# EAGLE board PDD_pan (EAGLE 6.2), part 1 of 2
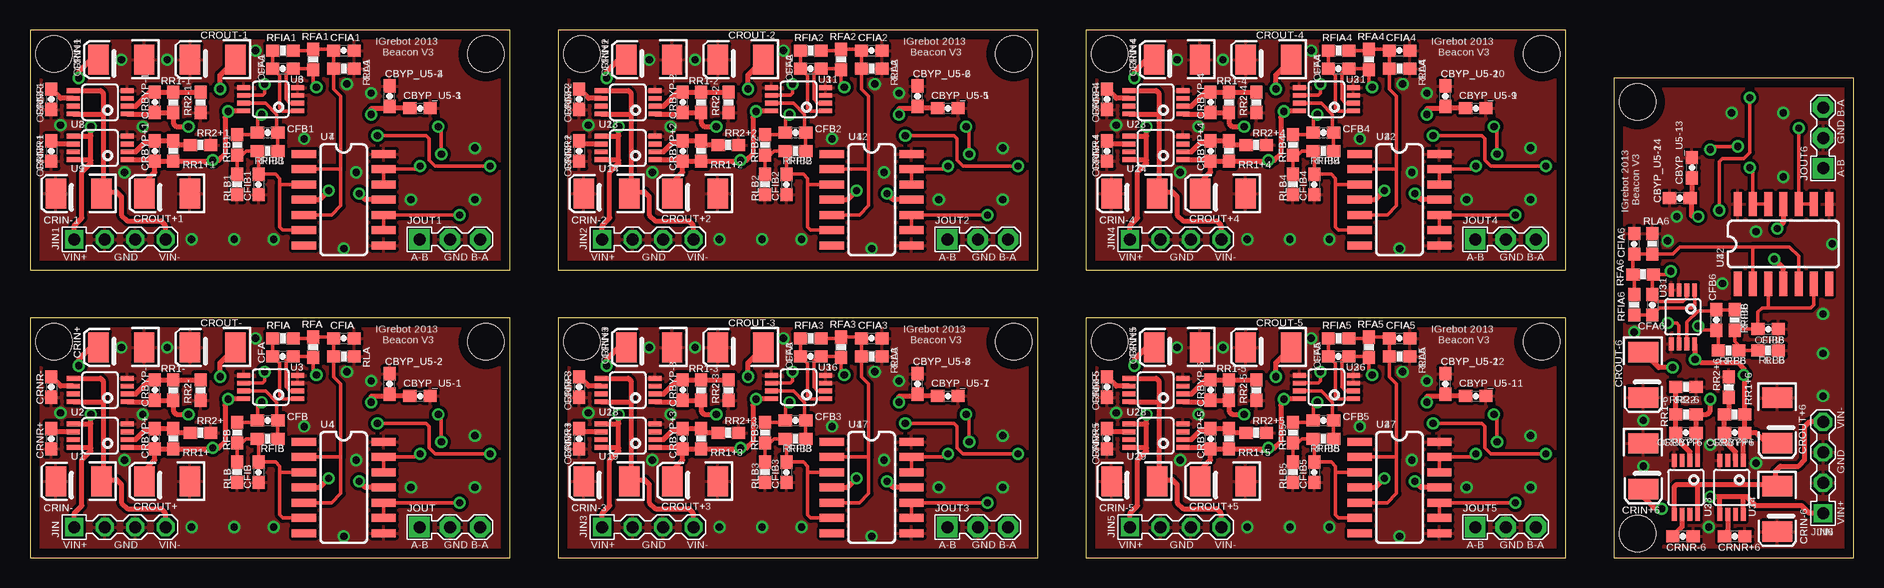
[diagram p0: board, top side]
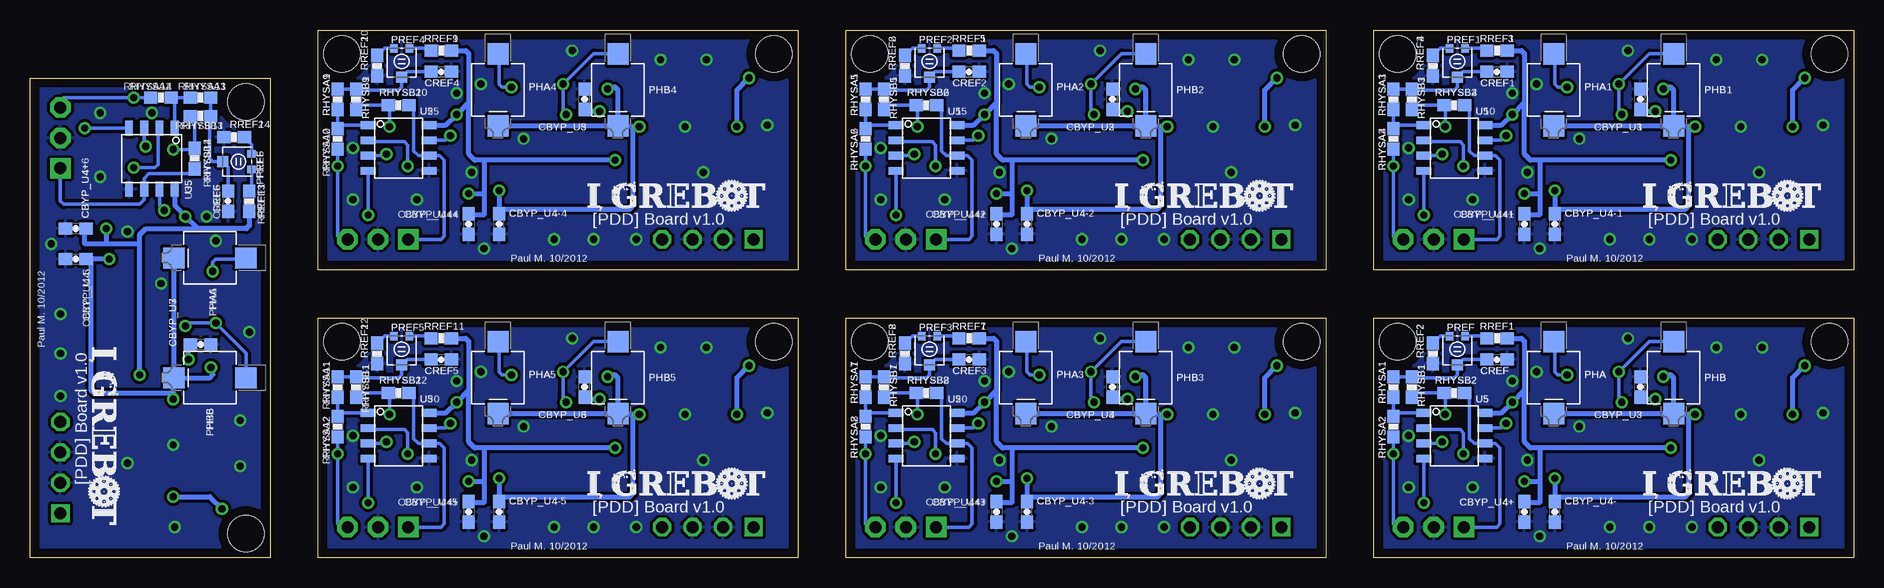
[diagram p1: board, bottom side, seen from below]

Size 152 x 44 mm. Coordinates in mm from the lower left corner, seen from the top.
Outline: 0,0 40,0 40,20 0,20 0,0
Outline: 0,24 40,24 40,44 0,44 0,24
Outline: 44,24 84,24 84,44 44,44 44,24
Outline: 44,0 84,0 84,20 44,20 44,0
Outline: 88,24 128,24 128,44 88,44 88,24
Outline: 88,0 128,0 128,20 88,20 88,0
Outline: 152,0 152,40 132,40 132,0 152,0
Copper layers (1*16): Top 0.035mm / dielectric 1.5mm / Bottom 0.035mm
Design rules: minimum track width 10mil, minimum drill 0.6mm, track to track 8mil, track to pad 8mil, pad to pad 8mil, via to via 8mil, smd to smd 8mil, copper to edge 30mil, drill to drill 10mil, minimum pad ring 10mil, minimum via ring 8mil, stop-mask expansion 4mil, vias tented up to drill 0mil, thermal gap 10mil
Holes 3 mm at 38,18 2,18 38,42 2,42 82,42 46,42 82,18 46,18 126,42 90,42 126,18 90,18 134,38 134,2

## Footprints (pad centres in the part's own frame; a part is rotated, then mirrored left to right if it is on the bottom)
0603-CAP = smd 1.1 x 1: 1 -0.85,0; 2 0.85,0
EIA3528-KIT = smd 1.7 x 2.5: A 1.9,0; C -1.9,0
CON4-2.54 = drill 1 square: 1 -3.81,0 | drill 1 octagon: 2 -1.27,0; 3 1.27,0; 4 3.81,0
CON3-2.54 = drill 1 pad 1.676 square: 1 -2.54,0 | drill 1 pad 1.676 octagon: 2 0,0; 3 2.54,0
VBPW34SR = smd 1.8 x 1.75: A -3,0; K 3,0
TRIM-PVZ2A = smd 0.6 x 0.7: 1 -0.65,-1.2; 3 0.65,-1.2 | smd 0.9 x 0.9: 2 0,1.2
0603-RES = smd 1.1 x 1: 1 -0.85,0; 2 0.85,0
MSOP8 = smd 0.4 x 1.1: 1 -0.975,-2.25; 2 -0.325,-2.25; 3 0.325,-2.25; 4 0.975,-2.25; 5 0.975,2.25; 6 0.325,2.25; 7 -0.325,2.25; 8 -0.975,2.25
SOIC14 = smd 0.66 x 2.032: 1 -3.81,-3.315; 2 -2.54,-3.315; 3 -1.27,-3.315; 4 0,-3.315; 5 1.27,-3.315; 6 2.54,-3.315; 7 3.81,-3.315; 8 3.81,3.315; 9 2.54,3.315; 10 1.27,3.315; 11 0,3.315; 12 -1.27,3.315; 13 -2.54,3.315; 14 -3.81,3.315
SOIC8 = smd 0.635 x 1.27: 1 -1.905,-2.54; 2 -0.635,-2.54; 3 0.635,-2.54; 4 1.905,-2.54; 5 1.905,2.54; 6 0.635,2.54; 7 -0.635,2.54; 8 -1.905,2.54

## Placement (x,y rotation side)
CBYP_U1  1uF  [0603-CAP]  17.78,38.22 90 bottom
CBYP_U2  1uF  [0603-CAP]  61.78,38.22 90 bottom
CBYP_U3  1uF  [0603-CAP]  17.78,14.22 90 bottom
CBYP_U4  1uF  [0603-CAP]  61.78,14.22 90 bottom
CBYP_U4+  1uF  [0603-CAP]  27.43,3.81 270 bottom
CBYP_U4+1  1uF  [0603-CAP]  27.43,27.81 270 bottom
CBYP_U4+2  1uF  [0603-CAP]  71.43,27.81 270 bottom
CBYP_U4+3  1uF  [0603-CAP]  71.43,3.81 270 bottom
CBYP_U4+4  1uF  [0603-CAP]  115.43,27.81 270 bottom
CBYP_U4+5  1uF  [0603-CAP]  115.43,3.81 270 bottom
CBYP_U4+6  1uF  [0603-CAP]  148.19,27.43 180 bottom
CBYP_U4-  1uF  [0603-CAP]  24.89,3.81 90 bottom
CBYP_U4-1  1uF  [0603-CAP]  24.89,27.81 90 bottom
CBYP_U4-2  1uF  [0603-CAP]  68.89,27.81 90 bottom
CBYP_U4-3  1uF  [0603-CAP]  68.89,3.81 90 bottom
CBYP_U4-4  1uF  [0603-CAP]  112.89,27.81 90 bottom
CBYP_U4-5  1uF  [0603-CAP]  112.89,3.81 90 bottom
CBYP_U4-6  1uF  [0603-CAP]  148.19,24.89 0 bottom
CBYP_U5  1uF  [0603-CAP]  105.78,38.22 90 bottom
CBYP_U5-1  1uF  [0603-CAP]  32.51,13.46 0 top
CBYP_U5-2  100nF  [0603-CAP]  29.97,14.48 90 top
CBYP_U5-3  1uF  [0603-CAP]  32.51,37.46 0 top
CBYP_U5-4  100nF  [0603-CAP]  29.97,38.48 90 top
CBYP_U5-5  1uF  [0603-CAP]  76.51,37.46 0 top
CBYP_U5-6  100nF  [0603-CAP]  73.97,38.48 90 top
CBYP_U5-7  1uF  [0603-CAP]  76.51,13.46 0 top
CBYP_U5-8  100nF  [0603-CAP]  73.97,14.48 90 top
CBYP_U5-9  1uF  [0603-CAP]  120.51,37.46 0 top
CBYP_U5-10  100nF  [0603-CAP]  117.97,38.48 90 top
CBYP_U5-11  1uF  [0603-CAP]  120.51,13.46 0 top
CBYP_U5-12  100nF  [0603-CAP]  117.97,14.48 90 top
CBYP_U5-13  1uF  [0603-CAP]  138.54,32.51 90 top
CBYP_U5-14  100nF  [0603-CAP]  137.52,29.97 180 top
CBYP_U6  1uF  [0603-CAP]  105.78,14.22 90 bottom
CBYP_U7  1uF  [0603-CAP]  137.78,17.78 0 bottom
CFA  33pF  [0603-CAP]  21.08,16.76 180 top
CFA1  33pF  [0603-CAP]  21.08,40.76 180 top
CFA2  33pF  [0603-CAP]  65.08,40.76 180 top
CFA3  33pF  [0603-CAP]  65.08,16.76 180 top
CFA4  33pF  [0603-CAP]  109.08,40.76 180 top
CFA5  33pF  [0603-CAP]  109.08,16.76 180 top
CFA6  33pF  [0603-CAP]  135.24,21.08 270 top
CFB  33pF  [0603-CAP]  19.81,11.43 0 top
CFB1  33pF  [0603-CAP]  19.81,35.43 0 top
CFB2  33pF  [0603-CAP]  63.81,35.43 0 top
CFB3  33pF  [0603-CAP]  63.81,11.43 0 top
CFB4  33pF  [0603-CAP]  107.81,35.43 0 top
CFB5  33pF  [0603-CAP]  107.81,11.43 0 top
CFB6  33pF  [0603-CAP]  140.57,19.81 90 top
CFIA  100nF  [0603-CAP]  26.16,18.29 0 top
CFIA1  100nF  [0603-CAP]  26.16,42.29 0 top
CFIA2  100nF  [0603-CAP]  70.16,42.29 0 top
CFIA3  100nF  [0603-CAP]  70.16,18.29 0 top
CFIA4  100nF  [0603-CAP]  114.16,42.29 0 top
CFIA5  100nF  [0603-CAP]  114.16,18.29 0 top
CFIA6  100nF  [0603-CAP]  133.71,26.16 90 top
CFIB  100nF  [0603-CAP]  19.05,7.11 270 top
CFIB1  100nF  [0603-CAP]  19.05,31.11 270 top
CFIB2  100nF  [0603-CAP]  63.05,31.11 270 top
CFIB3  100nF  [0603-CAP]  63.05,7.11 270 top
CFIB4  100nF  [0603-CAP]  107.05,31.11 270 top
CFIB5  100nF  [0603-CAP]  107.05,7.11 270 top
CFIB6  100nF  [0603-CAP]  144.89,19.05 0 top
CRBYP+  10nF  [0603-CAP]  10.41,9.91 90 top
CRBYP+1  10nF  [0603-CAP]  10.41,33.91 90 top
CRBYP+2  10nF  [0603-CAP]  54.41,33.91 90 top
CRBYP+3  10nF  [0603-CAP]  54.41,9.91 90 top
CRBYP+4  10nF  [0603-CAP]  98.41,33.91 90 top
CRBYP+5  10nF  [0603-CAP]  98.41,9.91 90 top
CRBYP+6  10nF  [0603-CAP]  142.09,10.41 180 top
CRBYP-  10nF  [0603-CAP]  10.41,13.97 90 top
CRBYP-1  10nF  [0603-CAP]  10.41,37.97 90 top
CRBYP-2  10nF  [0603-CAP]  54.41,37.97 90 top
CRBYP-3  10nF  [0603-CAP]  54.41,13.97 90 top
CRBYP-4  10nF  [0603-CAP]  98.41,37.97 90 top
CRBYP-5  10nF  [0603-CAP]  98.41,13.97 90 top
CRBYP-6  10nF  [0603-CAP]  138.03,10.41 180 top
CREF  470nF  [0603-CAP]  29.72,16.51 0 bottom
CREF1  470nF  [0603-CAP]  29.72,40.51 0 bottom
CREF2  470nF  [0603-CAP]  73.72,40.51 0 bottom
CREF3  470nF  [0603-CAP]  73.72,16.51 0 bottom
CREF4  470nF  [0603-CAP]  117.72,40.51 0 bottom
CREF5  470nF  [0603-CAP]  117.72,16.51 0 bottom
CREF6  470nF  [0603-CAP]  135.49,29.72 270 bottom
CRIN+  10uF  [EIA3528-KIT]  7.62,17.53 180 top
CRIN+1  10uF  [EIA3528-KIT]  7.62,41.53 180 top
CRIN+2  10uF  [EIA3528-KIT]  51.62,41.53 180 top
CRIN+3  10uF  [EIA3528-KIT]  51.62,17.53 180 top
CRIN+4  10uF  [EIA3528-KIT]  95.62,41.53 180 top
CRIN+5  10uF  [EIA3528-KIT]  95.62,17.53 180 top
CRIN+6  10uF  [EIA3528-KIT]  134.47,7.62 270 top
CRIN-  10uF  [EIA3528-KIT]  4.06,6.35 180 top
CRIN-1  10uF  [EIA3528-KIT]  4.06,30.35 180 top
CRIN-2  10uF  [EIA3528-KIT]  48.06,30.35 180 top
CRIN-3  10uF  [EIA3528-KIT]  48.06,6.35 180 top
CRIN-4  10uF  [EIA3528-KIT]  92.06,30.35 180 top
CRIN-5  10uF  [EIA3528-KIT]  92.06,6.35 180 top
CRIN-6  10uF  [EIA3528-KIT]  145.65,4.06 270 top
CRNR+  10nF  [0603-CAP]  1.78,9.91 270 top
CRNR+1  10nF  [0603-CAP]  1.78,33.91 270 top
CRNR+2  10nF  [0603-CAP]  45.78,33.91 270 top
CRNR+3  10nF  [0603-CAP]  45.78,9.91 270 top
CRNR+4  10nF  [0603-CAP]  89.78,33.91 270 top
CRNR+5  10nF  [0603-CAP]  89.78,9.91 270 top
CRNR+6  10nF  [0603-CAP]  142.09,1.78 0 top
CRNR-  10nF  [0603-CAP]  1.78,14.22 270 top
CRNR-1  10nF  [0603-CAP]  1.78,38.22 270 top
CRNR-2  10nF  [0603-CAP]  45.78,38.22 270 top
CRNR-3  10nF  [0603-CAP]  45.78,14.22 270 top
CRNR-4  10nF  [0603-CAP]  89.78,38.22 270 top
CRNR-5  10nF  [0603-CAP]  89.78,14.22 270 top
CRNR-6  10nF  [0603-CAP]  137.78,1.78 0 top
CROUT+  10uF  [EIA3528-KIT]  11.43,6.35 180 top
CROUT+1  10uF  [EIA3528-KIT]  11.43,30.35 180 top
CROUT+2  10uF  [EIA3528-KIT]  55.43,30.35 180 top
CROUT+3  10uF  [EIA3528-KIT]  55.43,6.35 180 top
CROUT+4  10uF  [EIA3528-KIT]  99.43,30.35 180 top
CROUT+5  10uF  [EIA3528-KIT]  99.43,6.35 180 top
CROUT+6  10uF  [EIA3528-KIT]  145.65,11.43 270 top
CROUT-  10uF  [EIA3528-KIT]  15.24,17.53 180 top
CROUT-1  10uF  [EIA3528-KIT]  15.24,41.53 180 top
CROUT-2  10uF  [EIA3528-KIT]  59.24,41.53 180 top
CROUT-3  10uF  [EIA3528-KIT]  59.24,17.53 180 top
CROUT-4  10uF  [EIA3528-KIT]  103.24,41.53 180 top
CROUT-5  10uF  [EIA3528-KIT]  103.24,17.53 180 top
CROUT-6  10uF  [EIA3528-KIT]  134.47,15.24 270 top
JIN  SIL4  [CON4-2.54]  7.5,2.54 0 top
JIN1  SIL4  [CON4-2.54]  7.5,26.54 0 top
JIN2  SIL4  [CON4-2.54]  51.5,26.54 0 top
JIN3  SIL4  [CON4-2.54]  51.5,2.54 0 top
JIN4  SIL4  [CON4-2.54]  95.5,26.54 0 top
JIN5  SIL4  [CON4-2.54]  95.5,2.54 0 top
JIN6  SIL4  [CON4-2.54]  149.46,7.5 90 top
JOUT  SIL3  [CON3-2.54]  35,2.54 0 top
JOUT1  SIL3  [CON3-2.54]  35,26.54 0 top
JOUT2  SIL3  [CON3-2.54]  79,26.54 0 top
JOUT3  SIL3  [CON3-2.54]  79,2.54 0 top
JOUT4  SIL3  [CON3-2.54]  123,26.54 0 top
JOUT5  SIL3  [CON3-2.54]  123,2.54 0 top
JOUT6  SIL3  [CON3-2.54]  149.46,35 90 top
PHA  VBPW34SR  [VBPW34SR]  25,15 90 bottom
PHA1  VBPW34SR  [VBPW34SR]  25,39 90 bottom
PHA2  VBPW34SR  [VBPW34SR]  69,39 90 bottom
PHA3  VBPW34SR  [VBPW34SR]  69,15 90 bottom
PHA4  VBPW34SR  [VBPW34SR]  113,39 90 bottom
PHA5  VBPW34SR  [VBPW34SR]  113,15 90 bottom
PHA6  VBPW34SR  [VBPW34SR]  137,25 0 bottom
PHB  VBPW34SR  [VBPW34SR]  15,15 90 bottom
PHB1  VBPW34SR  [VBPW34SR]  15,39 90 bottom
PHB2  VBPW34SR  [VBPW34SR]  59,39 90 bottom
PHB3  VBPW34SR  [VBPW34SR]  59,15 90 bottom
PHB4  VBPW34SR  [VBPW34SR]  103,39 90 bottom
PHB5  VBPW34SR  [VBPW34SR]  103,15 90 bottom
PHB6  VBPW34SR  [VBPW34SR]  137,15 0 bottom
PREF  100k  [TRIM-PVZ2A]  33.02,17.27 180 bottom
PREF1  100k  [TRIM-PVZ2A]  33.02,41.27 180 bottom
PREF2  100k  [TRIM-PVZ2A]  77.02,41.27 180 bottom
PREF3  100k  [TRIM-PVZ2A]  77.02,17.27 180 bottom
PREF4  100k  [TRIM-PVZ2A]  121.02,41.27 180 bottom
PREF5  100k  [TRIM-PVZ2A]  121.02,17.27 180 bottom
PREF6  100k  [TRIM-PVZ2A]  134.73,33.02 90 bottom
RFA  20k  [0603-RES]  23.62,17.53 90 top
RFA1  20k  [0603-RES]  23.62,41.53 90 top
RFA2  20k  [0603-RES]  67.62,41.53 90 top
RFA3  20k  [0603-RES]  67.62,17.53 90 top
RFA4  20k  [0603-RES]  111.62,41.53 90 top
RFA5  20k  [0603-RES]  111.62,17.53 90 top
RFA6  20k  [0603-RES]  134.47,23.62 180 top
RFB  20k  [0603-RES]  17.27,10.41 270 top
RFB1  20k  [0603-RES]  17.27,34.41 270 top
RFB2  20k  [0603-RES]  61.27,34.41 270 top
RFB3  20k  [0603-RES]  61.27,10.41 270 top
RFB4  20k  [0603-RES]  105.27,34.41 270 top
RFB5  20k  [0603-RES]  105.27,10.41 270 top
RFB6  20k  [0603-RES]  141.59,17.27 0 top
RFIA  100  [0603-RES]  21.08,18.29 0 top
RFIA1  100  [0603-RES]  21.08,42.29 0 top
RFIA2  100  [0603-RES]  65.08,42.29 0 top
RFIA3  100  [0603-RES]  65.08,18.29 0 top
RFIA4  100  [0603-RES]  109.08,42.29 0 top
RFIA5  100  [0603-RES]  109.08,18.29 0 top
RFIA6  100  [0603-RES]  133.71,21.08 90 top
RFIB  100  [0603-RES]  19.81,9.91 180 top
RFIB1  100  [0603-RES]  19.81,33.91 180 top
RFIB2  100  [0603-RES]  63.81,33.91 180 top
RFIB3  100  [0603-RES]  63.81,9.91 180 top
RFIB4  100  [0603-RES]  107.81,33.91 180 top
RFIB5  100  [0603-RES]  107.81,9.91 180 top
RFIB6  100  [0603-RES]  142.09,19.81 270 top
RHYSA1  100  [0603-RES]  38.35,14.22 270 bottom
RHYSA2  10k  [0603-RES]  38.35,10.92 270 bottom
RHYSA3  100  [0603-RES]  38.35,38.22 270 bottom
RHYSA4  10k  [0603-RES]  38.35,34.92 270 bottom
RHYSA5  100  [0603-RES]  82.35,38.22 270 bottom
RHYSA6  10k  [0603-RES]  82.35,34.92 270 bottom
RHYSA7  100  [0603-RES]  82.35,14.22 270 bottom
RHYSA8  10k  [0603-RES]  82.35,10.92 270 bottom
RHYSA9  100  [0603-RES]  126.35,38.22 270 bottom
RHYSA10  10k  [0603-RES]  126.35,34.92 270 bottom
RHYSA11  100  [0603-RES]  126.35,14.22 270 bottom
RHYSA12  10k  [0603-RES]  126.35,10.92 270 bottom
RHYSA13  100  [0603-RES]  137.78,38.35 180 bottom
RHYSA14  10k  [0603-RES]  141.08,38.35 180 bottom
RHYSB1  100  [0603-RES]  36.83,14.22 270 bottom
RHYSB2  10k  [0603-RES]  33.27,13.72 0 bottom
RHYSB3  100  [0603-RES]  36.83,38.22 270 bottom
RHYSB4  10k  [0603-RES]  33.27,37.72 0 bottom
RHYSB5  100  [0603-RES]  80.83,38.22 270 bottom
RHYSB6  10k  [0603-RES]  77.27,37.72 0 bottom
RHYSB7  100  [0603-RES]  80.83,14.22 270 bottom
RHYSB8  10k  [0603-RES]  77.27,13.72 0 bottom
RHYSB9  100  [0603-RES]  124.83,38.22 270 bottom
RHYSB10  10k  [0603-RES]  121.27,37.72 0 bottom
RHYSB11  100  [0603-RES]  124.83,14.22 270 bottom
RHYSB12  10k  [0603-RES]  121.27,13.72 0 bottom
RHYSB13  100  [0603-RES]  137.78,36.83 180 bottom
RHYSB14  10k  [0603-RES]  138.28,33.27 270 bottom
RLA  100k  [0603-RES]  26.16,16.76 180 top
RLA1  100k  [0603-RES]  26.16,40.76 180 top
RLA2  100k  [0603-RES]  70.16,40.76 180 top
RLA3  100k  [0603-RES]  70.16,16.76 180 top
RLA4  100k  [0603-RES]  114.16,40.76 180 top
RLA5  100k  [0603-RES]  114.16,16.76 180 top
RLA6  100k  [0603-RES]  135.24,26.16 270 top
RLB  100k  [0603-RES]  17.27,7.11 90 top
RLB1  100k  [0603-RES]  17.27,31.11 90 top
RLB2  100k  [0603-RES]  61.27,31.11 90 top
RLB3  100k  [0603-RES]  61.27,7.11 90 top
RLB4  100k  [0603-RES]  105.27,31.11 90 top
RLB5  100k  [0603-RES]  105.27,7.11 90 top
RLB6  100k  [0603-RES]  144.89,17.27 180 top
RR1+  31.6k  [0603-RES]  11.94,9.91 270 top
RR1+1  31.6k  [0603-RES]  11.94,33.91 270 top
RR1+2  31.6k  [0603-RES]  55.94,33.91 270 top
RR1+3  31.6k  [0603-RES]  55.94,9.91 270 top
RR1+4  31.6k  [0603-RES]  99.94,33.91 270 top
RR1+5  31.6k  [0603-RES]  99.94,9.91 270 top
RR1+6  31.6k  [0603-RES]  142.09,11.94 0 top
RR1-  31.6k  [0603-RES]  11.94,13.97 270 top
RR1-1  31.6k  [0603-RES]  11.94,37.97 270 top
RR1-2  31.6k  [0603-RES]  55.94,37.97 270 top
RR1-3  31.6k  [0603-RES]  55.94,13.97 270 top
RR1-4  31.6k  [0603-RES]  99.94,37.97 270 top
RR1-5  31.6k  [0603-RES]  99.94,13.97 270 top
RR1-6  31.6k  [0603-RES]  138.03,11.94 0 top
RR2+  10k  [0603-RES]  14.22,10.41 180 top
RR2+1  10k  [0603-RES]  14.22,34.41 180 top
RR2+2  10k  [0603-RES]  58.22,34.41 180 top
RR2+3  10k  [0603-RES]  58.22,10.41 180 top
RR2+4  10k  [0603-RES]  102.22,34.41 180 top
RR2+5  10k  [0603-RES]  102.22,10.41 180 top
RR2+6  10k  [0603-RES]  141.59,14.22 270 top
RR2-  10k  [0603-RES]  14.22,13.97 90 top
RR2-1  10k  [0603-RES]  14.22,37.97 90 top
RR2-2  10k  [0603-RES]  58.22,37.97 90 top
RR2-3  10k  [0603-RES]  58.22,13.97 90 top
RR2-4  10k  [0603-RES]  102.22,37.97 90 top
RR2-5  10k  [0603-RES]  102.22,13.97 90 top
RR2-6  10k  [0603-RES]  138.03,14.22 180 top
RREF1  100  [0603-RES]  29.72,18.29 180 bottom
RREF2  100  [0603-RES]  35.05,17.02 90 bottom
RREF3  100  [0603-RES]  29.72,42.29 180 bottom
RREF4  100  [0603-RES]  35.05,41.02 90 bottom
RREF5  100  [0603-RES]  73.72,42.29 180 bottom
RREF6  100  [0603-RES]  79.05,41.02 90 bottom
RREF7  100  [0603-RES]  73.72,18.29 180 bottom
RREF8  100  [0603-RES]  79.05,17.02 90 bottom
RREF9  100  [0603-RES]  117.72,42.29 180 bottom
RREF10  100  [0603-RES]  123.05,41.02 90 bottom
RREF11  100  [0603-RES]  117.72,18.29 180 bottom
RREF12  100  [0603-RES]  123.05,17.02 90 bottom
RREF13  100  [0603-RES]  133.71,29.72 90 bottom
RREF14  100  [0603-RES]  134.98,35.05 0 bottom
U1  TPS7A4901NO_PAD  [MSOP8]  5.84,10.16 90 top
U2  TPS7A3001NO_PAD  [MSOP8]  5.84,13.97 90 top
U3  OPA2380  [MSOP8]  20.07,14.22 90 top
U4  INA2143  [SOIC14]  26.16,5.84 270 top
U5  TLV3502  [SOIC8]  33.27,10.16 270 bottom
U6  OPA2380  [MSOP8]  20.07,38.22 90 top
U7  INA2143  [SOIC14]  26.16,29.84 270 top
U8  TPS7A3001NO_PAD  [MSOP8]  5.84,37.97 90 top
U9  TPS7A4901NO_PAD  [MSOP8]  5.84,34.16 90 top
U10  TLV3502  [SOIC8]  33.27,34.16 270 bottom
U11  OPA2380  [MSOP8]  64.07,38.22 90 top
U12  INA2143  [SOIC14]  70.16,29.84 270 top
U13  TPS7A3001NO_PAD  [MSOP8]  49.84,37.97 90 top
U14  TPS7A4901NO_PAD  [MSOP8]  49.84,34.16 90 top
U15  TLV3502  [SOIC8]  77.27,34.16 270 bottom
U16  OPA2380  [MSOP8]  64.07,14.22 90 top
U17  INA2143  [SOIC14]  70.16,5.84 270 top
U18  TPS7A3001NO_PAD  [MSOP8]  49.84,13.97 90 top
U19  TPS7A4901NO_PAD  [MSOP8]  49.84,10.16 90 top
U20  TLV3502  [SOIC8]  77.27,10.16 270 bottom
U21  OPA2380  [MSOP8]  108.07,38.22 90 top
U22  INA2143  [SOIC14]  114.16,29.84 270 top
U23  TPS7A3001NO_PAD  [MSOP8]  93.84,37.97 90 top
U24  TPS7A4901NO_PAD  [MSOP8]  93.84,34.16 90 top
U25  TLV3502  [SOIC8]  121.27,34.16 270 bottom
U26  OPA2380  [MSOP8]  108.07,14.22 90 top
U27  INA2143  [SOIC14]  114.16,5.84 270 top
U28  TPS7A3001NO_PAD  [MSOP8]  93.84,13.97 90 top
U29  TPS7A4901NO_PAD  [MSOP8]  93.84,10.16 90 top
U30  TLV3502  [SOIC8]  121.27,10.16 270 bottom
U31  OPA2380  [MSOP8]  137.78,20.07 180 top
U32  INA2143  [SOIC14]  146.16,26.16 0 top
U33  TPS7A3001NO_PAD  [MSOP8]  138.03,5.84 180 top
U34  TPS7A4901NO_PAD  [MSOP8]  141.84,5.84 180 top
U35  TLV3502  [SOIC8]  141.84,33.27 180 bottom

## Library data of the parts
CBYP_U1-CBYP_U4 CBYP_U4+ CBYP_U4+1-CBYP_U4+6 CBYP_U4- CBYP_U4-1-CBYP_U4-6 CBYP_U5 CBYP_U5-1-CBYP_U5-14 CBYP_U6 CBYP_U7 CFA CFA1-CFA6 CFB CFB1-CFB6 CFIA CFIA1-CFIA6 CFIB CFIB1-CFIB6 CRBYP+ CRBYP+1-CRBYP+6 CRBYP- CRBYP-1-CRBYP-6 CREF CREF1-CREF6 CRIN+ CRIN+1-CRIN+6 CRIN- CRIN-1-CRIN-6 CRNR+ CRNR+1-CRNR+6 CRNR- CRNR-1-CRNR-6 CROUT+ CROUT+1-CROUT+6 CROUT- CROUT-1-CROUT-6 RFA RFA1-RFA6 RFB RFB1-RFB6 RFIA RFIA1-RFIA6 RFIB RFIB1-RFIB6 RHYSA1-RHYSA14 RHYSB1-RHYSB14 RLA RLA1-RLA6 RLB RLB1-RLB6 RR1+ RR1+1-RR1+6 RR1- RR1-1-RR1-6 RR2+ RR2+1-RR2+6 RR2- RR2-1-RR2-6 RREF1-RREF14 = SparkFun-Passives
JIN JIN1-JIN6 JOUT JOUT1-JOUT6 PHA PHA1-PHA6 PHB PHB1-PHB6 PREF PREF1-PREF6 U1-U35 = lib_paul_v6

## Nets
!CMP_A-B!: JOUT.1 RHYSB2.2 U5.6
!CMP_A-B!1: JOUT1.1 RHYSB4.2 U10.6
!CMP_A-B!2: JOUT2.1 RHYSB6.2 U15.6
!CMP_A-B!3: JOUT3.1 RHYSB8.2 U20.6
!CMP_A-B!4: JOUT4.1 RHYSB10.2 U25.6
!CMP_A-B!5: JOUT5.1 RHYSB12.2 U30.6
!CMP_A-B!6: JOUT6.1 RHYSB14.2 U35.6
!CMP_B-A!: JOUT.3 RHYSA2.2 U5.7
!CMP_B-A!1: JOUT1.3 RHYSA4.2 U10.7
!CMP_B-A!2: JOUT2.3 RHYSA6.2 U15.7
!CMP_B-A!3: JOUT3.3 RHYSA8.2 U20.7
!CMP_B-A!4: JOUT4.3 RHYSA10.2 U25.7
!CMP_B-A!5: JOUT5.3 RHYSA12.2 U30.7
!CMP_B-A!6: JOUT6.3 RHYSA14.2 U35.7
+5V: CBYP_U3.1 CBYP_U4+.1 CBYP_U5-1.1 CBYP_U5-2.1 CRBYP+.1 CROUT+.A RR1+.2 RREF1.1 U1.1 U3.8 U4.11 U5.8
+5V1: CBYP_U1.1 CBYP_U4+1.1 CBYP_U5-3.1 CBYP_U5-4.1 CRBYP+1.1 CROUT+1.A RR1+1.2 RREF3.1 U6.8 U7.11 U9.1 U10.8
+5V2: CBYP_U2.1 CBYP_U4+2.1 CBYP_U5-5.1 CBYP_U5-6.1 CRBYP+2.1 CROUT+2.A RR1+2.2 RREF5.1 U11.8 U12.11 U14.1 U15.8
+5V3: CBYP_U4+3.1 CBYP_U4.1 CBYP_U5-7.1 CBYP_U5-8.1 CRBYP+3.1 CROUT+3.A RR1+3.2 RREF7.1 U16.8 U17.11 U19.1 U20.8
+5V4: CBYP_U4+4.1 CBYP_U5-9.1 CBYP_U5-10.1 CBYP_U5.1 CRBYP+4.1 CROUT+4.A RR1+4.2 RREF9.1 U21.8 U22.11 U24.1 U25.8
+5V5: CBYP_U4+5.1 CBYP_U5-11.1 CBYP_U5-12.1 CBYP_U6.1 CRBYP+5.1 CROUT+5.A RR1+5.2 RREF11.1 U26.8 U27.11 U29.1 U30.8
+5V6: CBYP_U4+6.1 CBYP_U5-13.1 CBYP_U5-14.1 CBYP_U7.1 CRBYP+6.1 CROUT+6.A RR1+6.2 RREF13.1 U31.8 U32.11 U34.1 U35.8
-5V: CBYP_U4-.2 CRBYP-.1 CROUT-.C PHA.A PHB.A RR1-.2 U2.1 U4.4
-5V1: CBYP_U4-1.2 CRBYP-1.1 CROUT-1.C PHA1.A PHB1.A RR1-1.2 U7.4 U8.1
-5V2: CBYP_U4-2.2 CRBYP-2.1 CROUT-2.C PHA2.A PHB2.A RR1-2.2 U12.4 U13.1
-5V3: CBYP_U4-3.2 CRBYP-3.1 CROUT-3.C PHA3.A PHB3.A RR1-3.2 U17.4 U18.1
-5V4: CBYP_U4-4.2 CRBYP-4.1 CROUT-4.C PHA4.A PHB4.A RR1-4.2 U22.4 U23.1
-5V5: CBYP_U4-5.2 CRBYP-5.1 CROUT-5.C PHA5.A PHB5.A RR1-5.2 U27.4 U28.1
-5V6: CBYP_U4-6.2 CRBYP-6.1 CROUT-6.C PHA6.A PHB6.A RR1-6.2 U32.4 U33.1
AGND: CBYP_U3.2 CBYP_U4+.2 CBYP_U4-.1 CBYP_U5-1.2 CBYP_U5-2.2 CFIA.2 CFIB.2 CREF.2 CRIN+.C CRIN-.A CRNR+.2 CRNR-.2 CROUT+.C CROUT-.A JIN.2 JIN.3 JOUT.2 RLA.1 RLB.1 RR2+.1 RR2-.1 RREF2.1 U1.4 U2.4 U3.3 U3.4 U3.5 U4.8 U4.14 U5.5
AGND1: CBYP_U1.2 CBYP_U4+1.2 CBYP_U4-1.1 CBYP_U5-3.2 CBYP_U5-4.2 CFIA1.2 CFIB1.2 CREF1.2 CRIN+1.C CRIN-1.A CRNR+1.2 CRNR-1.2 CROUT+1.C CROUT-1.A JIN1.2 JIN1.3 JOUT1.2 RLA1.1 RLB1.1 RR2+1.1 RR2-1.1 RREF4.1 U6.3 U6.4 U6.5 U7.8 U7.14 U8.4 U9.4 U10.5
AGND2: CBYP_U2.2 CBYP_U4+2.2 CBYP_U4-2.1 CBYP_U5-5.2 CBYP_U5-6.2 CFIA2.2 CFIB2.2 CREF2.2 CRIN+2.C CRIN-2.A CRNR+2.2 CRNR-2.2 CROUT+2.C CROUT-2.A JIN2.2 JIN2.3 JOUT2.2 RLA2.1 RLB2.1 RR2+2.1 RR2-2.1 RREF6.1 U11.3 U11.4 U11.5 U12.8 U12.14 U13.4 U14.4 U15.5
AGND3: CBYP_U4+3.2 CBYP_U4-3.1 CBYP_U4.2 CBYP_U5-7.2 CBYP_U5-8.2 CFIA3.2 CFIB3.2 CREF3.2 CRIN+3.C CRIN-3.A CRNR+3.2 CRNR-3.2 CROUT+3.C CROUT-3.A JIN3.2 JIN3.3 JOUT3.2 RLA3.1 RLB3.1 RR2+3.1 RR2-3.1 RREF8.1 U16.3 U16.4 U16.5 U17.8 U17.14 U18.4 U19.4 U20.5
AGND4: CBYP_U4+4.2 CBYP_U4-4.1 CBYP_U5-9.2 CBYP_U5-10.2 CBYP_U5.2 CFIA4.2 CFIB4.2 CREF4.2 CRIN+4.C CRIN-4.A CRNR+4.2 CRNR-4.2 CROUT+4.C CROUT-4.A JIN4.2 JIN4.3 JOUT4.2 RLA4.1 RLB4.1 RR2+4.1 RR2-4.1 RREF10.1 U21.3 U21.4 U21.5 U22.8 U22.14 U23.4 U24.4 U25.5
AGND5: CBYP_U4+5.2 CBYP_U4-5.1 CBYP_U5-11.2 CBYP_U5-12.2 CBYP_U6.2 CFIA5.2 CFIB5.2 CREF5.2 CRIN+5.C CRIN-5.A CRNR+5.2 CRNR-5.2 CROUT+5.C CROUT-5.A JIN5.2 JIN5.3 JOUT5.2 RLA5.1 RLB5.1 RR2+5.1 RR2-5.1 RREF12.1 U26.3 U26.4 U26.5 U27.8 U27.14 U28.4 U29.4 U30.5
AGND6: CBYP_U4+6.2 CBYP_U4-6.1 CBYP_U5-13.2 CBYP_U5-14.2 CBYP_U7.2 CFIA6.2 CFIB6.2 CREF6.2 CRIN+6.C CRIN-6.A CRNR+6.2 CRNR-6.2 CROUT+6.C CROUT-6.A JIN6.2 JIN6.3 JOUT6.2 RLA6.1 RLB6.1 RR2+6.1 RR2-6.1 RREF14.1 U31.3 U31.4 U31.5 U32.8 U32.14 U33.4 U34.4 U35.5
N$1: CRNR+.1 U1.6
N$2: CRBYP-.2 RR1-.1 RR2-.2 U2.2
N$3: CFA.2 RFIA.1 U3.1
N$4: CRNR-.1 U2.6
N$5: CFA.1 PHA.K RFA.1 U3.2
N$6: CFB.2 RFIB.1 U3.7
N$7: CRBYP+.2 RR1+.1 RR2+.2 U1.2
N$8: CFB.1 PHB.K RFB.1 U3.6
N$9: CRNR+1.1 U9.6
N$10: CRNR-1.1 U8.6
N$11: CRBYP+1.2 RR1+1.1 RR2+1.2 U9.2
N$12: CRBYP-1.2 RR1-1.1 RR2-1.2 U8.2
N$13: CFA1.2 RFIA1.1 U6.1
N$14: RHYSA1.2 RHYSA2.1 U5.1
N$15: RHYSB1.2 RHYSB2.1 U5.3
N$16: CFA1.1 PHA1.K RFA1.1 U6.2
N$17: PREF.1 RREF1.2
N$18: PREF.3 RREF2.2
N$19: CFB1.2 RFIB1.1 U6.7
N$20: CFB1.1 PHB1.K RFB1.1 U6.6
N$21: RHYSA3.2 RHYSA4.1 U10.1
N$22: RHYSB3.2 RHYSB4.1 U10.3
N$23: PREF1.1 RREF3.2
N$24: PREF1.3 RREF4.2
N$25: CRNR+2.1 U14.6
N$26: CRNR-2.1 U13.6
N$27: CRBYP+2.2 RR1+2.1 RR2+2.2 U14.2
N$28: CRBYP-2.2 RR1-2.1 RR2-2.2 U13.2
N$29: CFA2.2 RFIA2.1 U11.1
N$30: CFA2.1 PHA2.K RFA2.1 U11.2
N$31: CFB2.2 RFIB2.1 U11.7
N$32: CFB2.1 PHB2.K RFB2.1 U11.6
N$33: RHYSA5.2 RHYSA6.1 U15.1
N$34: RHYSB5.2 RHYSB6.1 U15.3
N$35: PREF2.1 RREF5.2
N$36: PREF2.3 RREF6.2
N$37: CRNR+3.1 U19.6
N$38: CRNR-3.1 U18.6
N$39: CRBYP+3.2 RR1+3.1 RR2+3.2 U19.2
N$40: CRBYP-3.2 RR1-3.1 RR2-3.2 U18.2
N$41: CFA3.2 RFIA3.1 U16.1
N$42: CFA3.1 PHA3.K RFA3.1 U16.2
N$43: CFB3.2 RFIB3.1 U16.7
N$44: CFB3.1 PHB3.K RFB3.1 U16.6
N$45: RHYSA7.2 RHYSA8.1 U20.1
N$46: RHYSB7.2 RHYSB8.1 U20.3
N$47: PREF3.1 RREF7.2
N$48: PREF3.3 RREF8.2
N$49: CRNR+4.1 U24.6
N$50: CRNR-4.1 U23.6
N$51: CRBYP+4.2 RR1+4.1 RR2+4.2 U24.2
N$52: CRBYP-4.2 RR1-4.1 RR2-4.2 U23.2
N$53: CFA4.2 RFIA4.1 U21.1
N$54: CFA4.1 PHA4.K RFA4.1 U21.2
N$55: CFB4.2 RFIB4.1 U21.7
N$56: CFB4.1 PHB4.K RFB4.1 U21.6
N$57: RHYSA9.2 RHYSA10.1 U25.1
N$58: RHYSB9.2 RHYSB10.1 U25.3
N$59: PREF4.1 RREF9.2
N$60: PREF4.3 RREF10.2
N$61: CRNR+5.1 U29.6
N$62: CRNR-5.1 U28.6
N$63: CRBYP+5.2 RR1+5.1 RR2+5.2 U29.2
N$64: CRBYP-5.2 RR1-5.1 RR2-5.2 U28.2
N$65: CFA5.2 RFIA5.1 U26.1
N$66: CFA5.1 PHA5.K RFA5.1 U26.2
N$67: CFB5.2 RFIB5.1 U26.7
N$68: CFB5.1 PHB5.K RFB5.1 U26.6
N$69: RHYSA11.2 RHYSA12.1 U30.1
N$70: RHYSB11.2 RHYSB12.1 U30.3
N$71: PREF5.1 RREF11.2
N$72: PREF5.3 RREF12.2
N$73: CRNR+6.1 U34.6
N$74: CRNR-6.1 U33.6
N$75: CRBYP+6.2 RR1+6.1 RR2+6.2 U34.2
N$76: CRBYP-6.2 RR1-6.1 RR2-6.2 U33.2
N$77: CFA6.2 RFIA6.1 U31.1
N$78: CFA6.1 PHA6.K RFA6.1 U31.2
N$79: CFB6.2 RFIB6.1 U31.7
N$80: CFB6.1 PHB6.K RFB6.1 U31.6
N$81: RHYSA13.2 RHYSA14.1 U35.1
N$82: RHYSB13.2 RHYSB14.1 U35.3
N$83: PREF6.1 RREF13.2
N$84: PREF6.3 RREF14.2
SUB_A-B: U4.9 U4.10 U5.4
SUB_A-B1: U7.9 U7.10 U10.4
SUB_A-B2: U12.9 U12.10 U15.4
SUB_A-B3: U17.9 U17.10 U20.4
SUB_A-B4: U22.9 U22.10 U25.4
SUB_A-B5: U27.9 U27.10 U30.4
SUB_A-B6: U32.9 U32.10 U35.4
SUB_B-A: U4.12 U4.13 U5.2
SUB_B-A1: U7.12 U7.13 U10.2
SUB_B-A2: U12.12 U12.13 U15.2
SUB_B-A3: U17.12 U17.13 U20.2
SUB_B-A4: U22.12 U22.13 U25.2
SUB_B-A5: U27.12 U27.13 U30.2
SUB_B-A6: U32.12 U32.13 U35.2
TI_A: CFIA.1 RFA.2 RFIA.2 RLA.2 U4.2 U4.5
TI_A1: CFIA1.1 RFA1.2 RFIA1.2 RLA1.2 U7.2 U7.5
TI_A2: CFIA2.1 RFA2.2 RFIA2.2 RLA2.2 U12.2 U12.5
TI_A3: CFIA3.1 RFA3.2 RFIA3.2 RLA3.2 U17.2 U17.5
TI_A4: CFIA4.1 RFA4.2 RFIA4.2 RLA4.2 U22.2 U22.5
TI_A5: CFIA5.1 RFA5.2 RFIA5.2 RLA5.2 U27.2 U27.5
TI_A6: CFIA6.1 RFA6.2 RFIA6.2 RLA6.2 U32.2 U32.5
TI_B: CFIB.1 RFB.2 RFIB.2 RLB.2 U4.3 U4.6
TI_B1: CFIB1.1 RFB1.2 RFIB1.2 RLB1.2 U7.3 U7.6
TI_B2: CFIB2.1 RFB2.2 RFIB2.2 RLB2.2 U12.3 U12.6
TI_B3: CFIB3.1 RFB3.2 RFIB3.2 RLB3.2 U17.3 U17.6
TI_B4: CFIB4.1 RFB4.2 RFIB4.2 RLB4.2 U22.3 U22.6
TI_B5: CFIB5.1 RFB5.2 RFIB5.2 RLB5.2 U27.3 U27.6
TI_B6: CFIB6.1 RFB6.2 RFIB6.2 RLB6.2 U32.3 U32.6
VIN+: CRIN+.A JIN.1 U1.5 U1.8
VIN+1: CRIN+1.A JIN1.1 U9.5 U9.8
VIN+2: CRIN+2.A JIN2.1 U14.5 U14.8
VIN+3: CRIN+3.A JIN3.1 U19.5 U19.8
VIN+4: CRIN+4.A JIN4.1 U24.5 U24.8
VIN+5: CRIN+5.A JIN5.1 U29.5 U29.8
VIN+6: CRIN+6.A JIN6.1 U34.5 U34.8
VIN-: CRIN-.C JIN.4 U2.5 U2.8
VIN-1: CRIN-1.C JIN1.4 U8.5 U8.8
VIN-2: CRIN-2.C JIN2.4 U13.5 U13.8
VIN-3: CRIN-3.C JIN3.4 U18.5 U18.8
VIN-4: CRIN-4.C JIN4.4 U23.5 U23.8
VIN-5: CRIN-5.C JIN5.4 U28.5 U28.8
VIN-6: CRIN-6.C JIN6.4 U33.5 U33.8
VREF: CREF.1 PREF.2 RHYSA1.1 RHYSB1.1
VREF1: CREF1.1 PREF1.2 RHYSA3.1 RHYSB3.1
VREF2: CREF2.1 PREF2.2 RHYSA5.1 RHYSB5.1
VREF3: CREF3.1 PREF3.2 RHYSA7.1 RHYSB7.1
VREF4: CREF4.1 PREF4.2 RHYSA9.1 RHYSB9.1
VREF5: CREF5.1 PREF5.2 RHYSA11.1 RHYSB11.1
VREF6: CREF6.1 PREF6.2 RHYSA13.1 RHYSB13.1